# Altium PCB ArtFire.PcbDoc
Units mil, origin at the board's own origin, x right, y up, seen from the top; angles counter-clockwise.
Board outline 3779.53 x 3504.02 mil, 2 copper layers (Top Layer, Bottom Layer); 112 components, 86 nets, 393 pads, 153 vias.
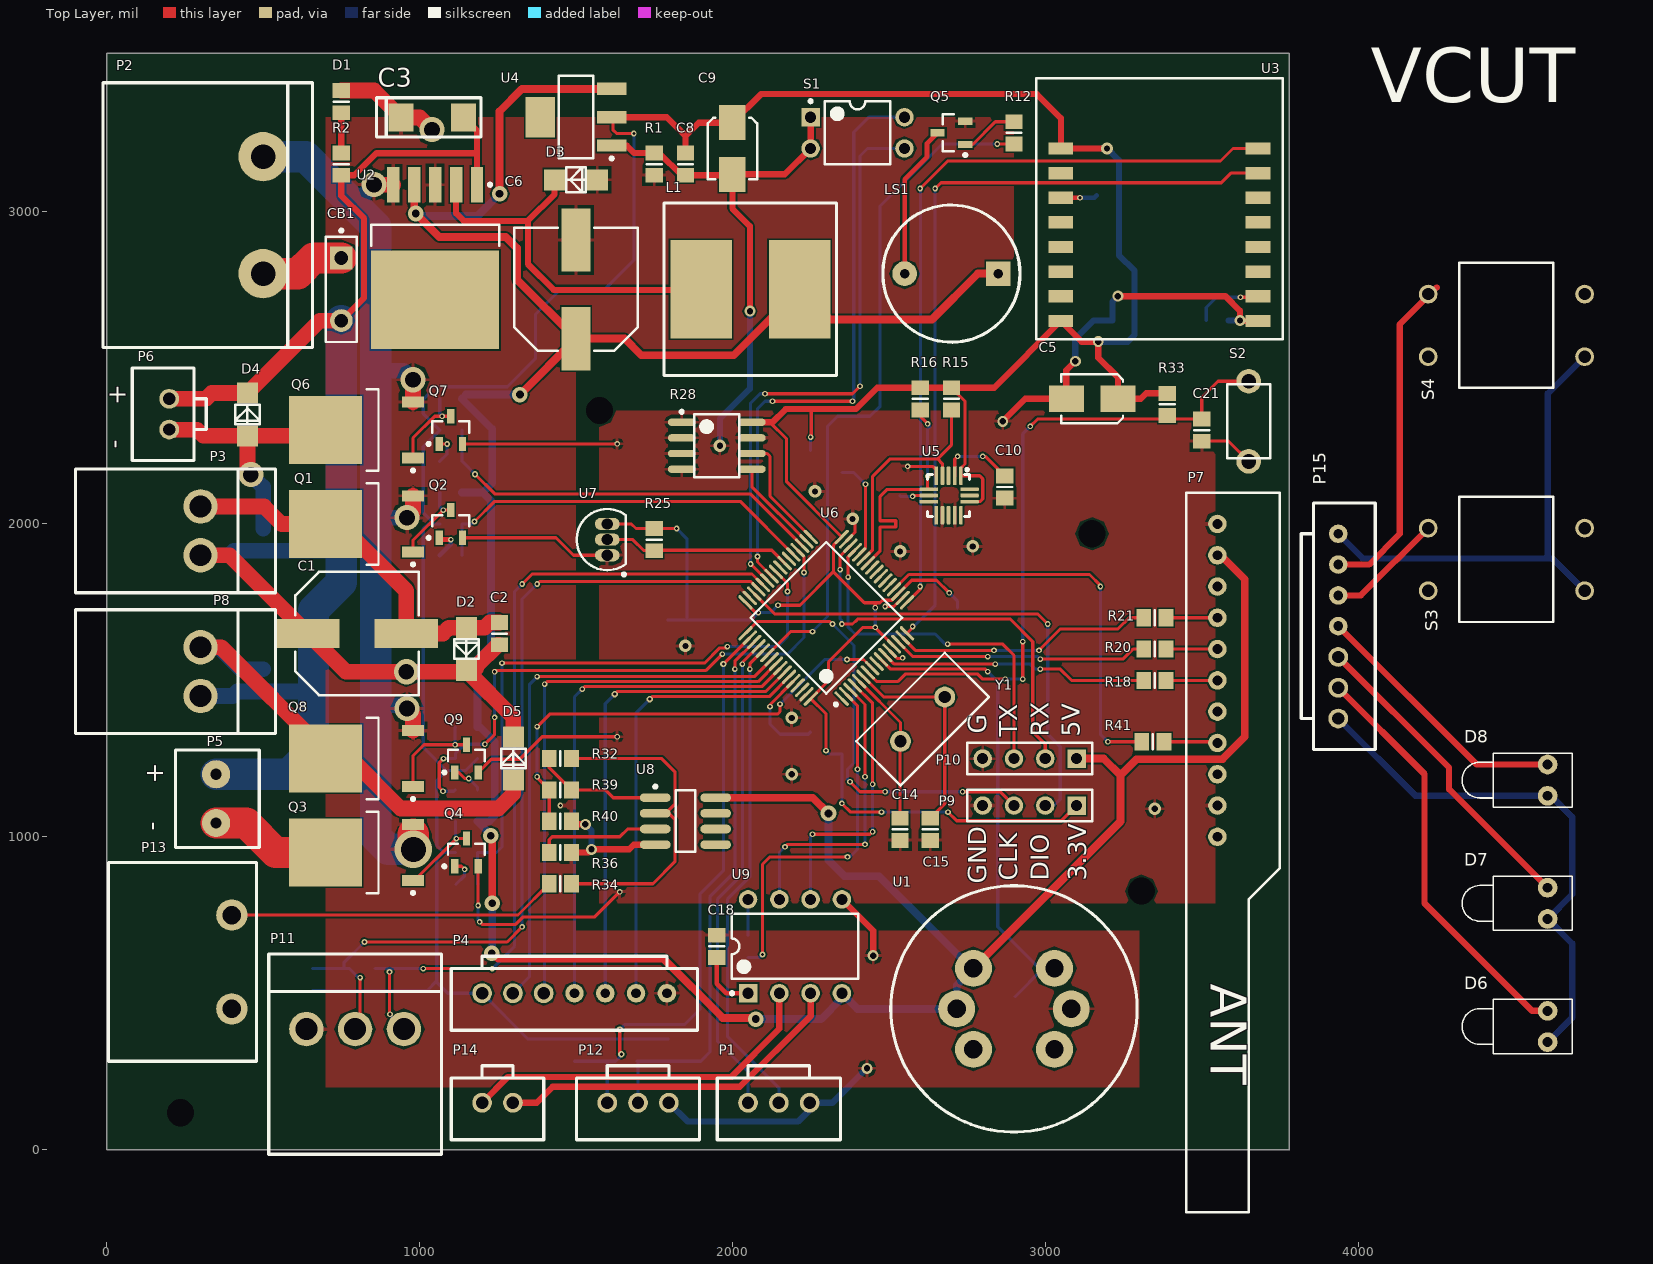
[diagram p0: Top Layer view]
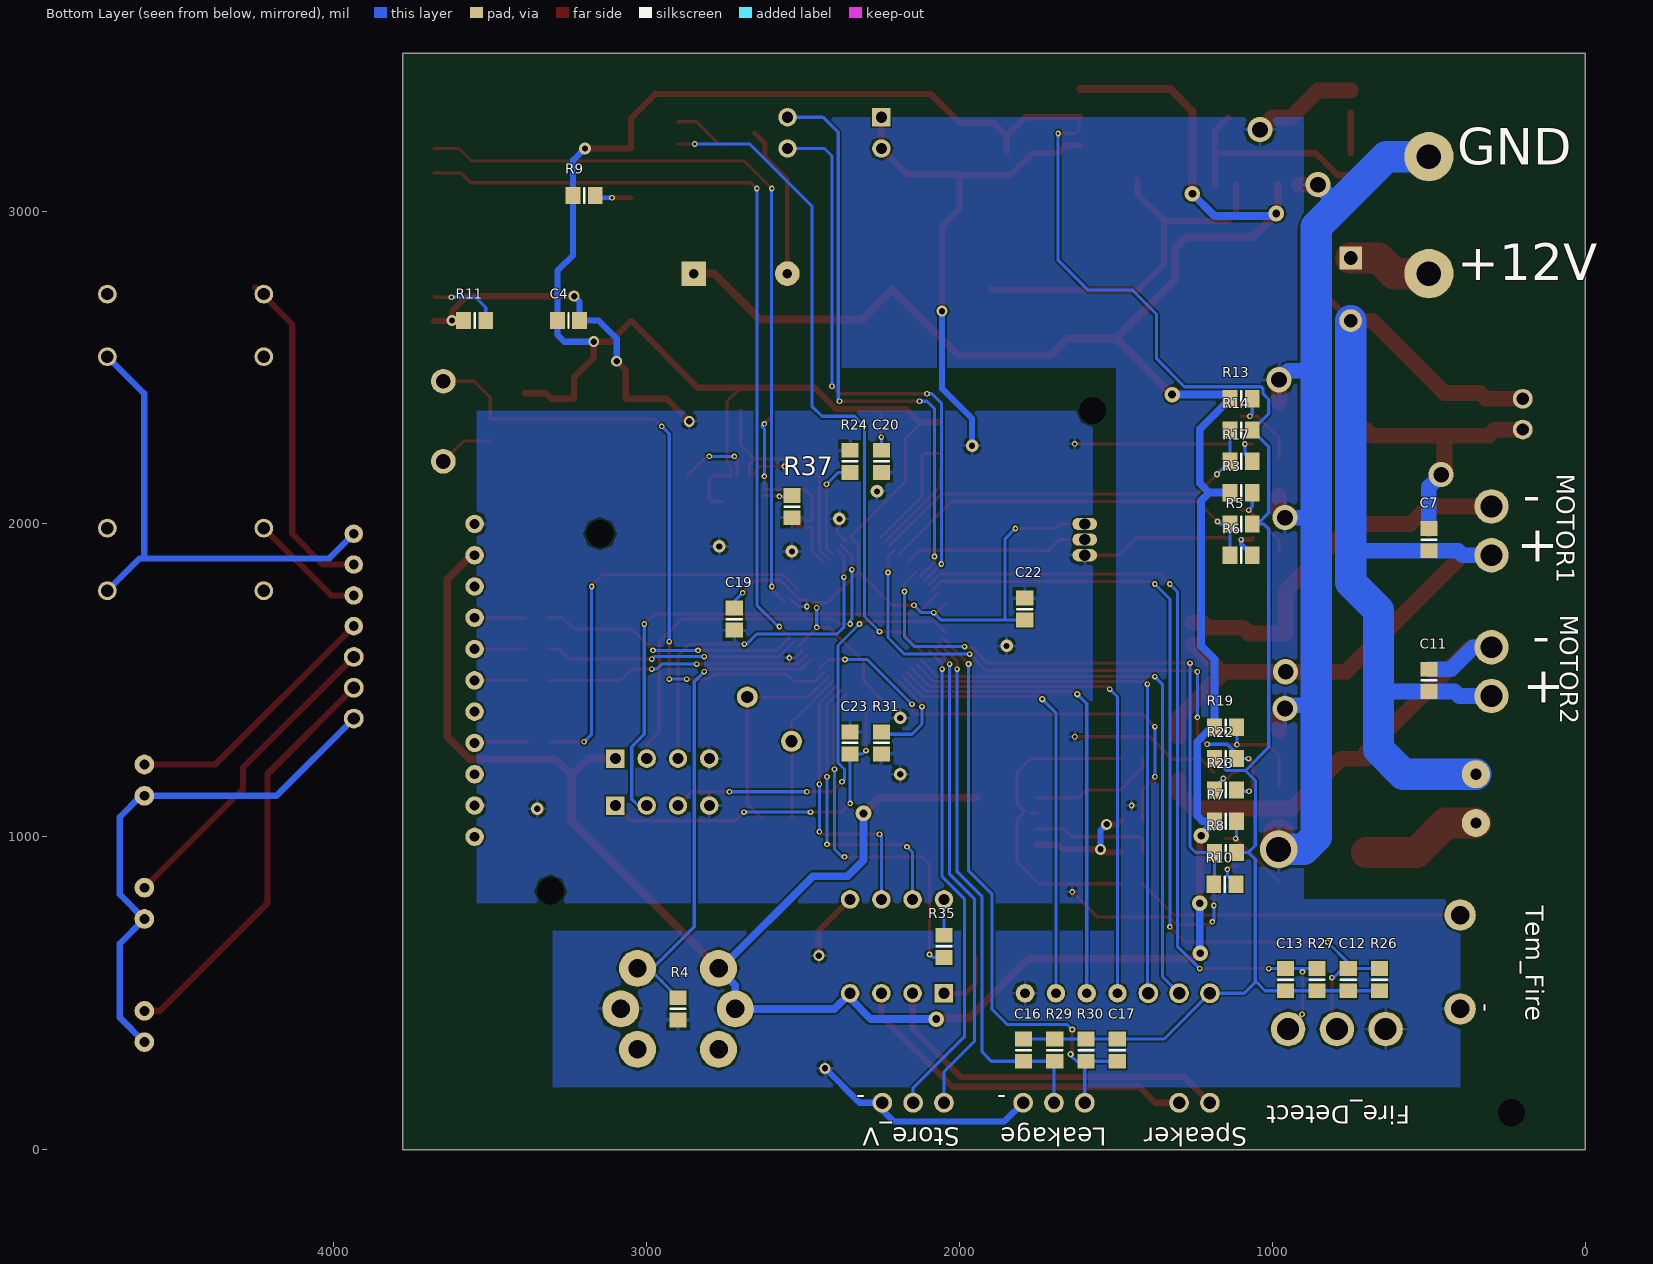
[diagram p1: Bottom Layer view, seen from below]

## Layer stack, top to bottom
Top Solder: solder mask 0.4, Solder Resist, Dk 3.5
Top Layer: signal copper 1.4
Dielectric 1: dielectric 12.6, FR-4, Dk 4.8
Bottom Layer: signal copper 1.4
Bottom Solder: solder mask 0.4, Solder Resist, Dk 3.5

## Board outline
0,0 0,3503.94 3779.45,3503.94 3779.53,3504.02 3779.53,0

## Design rules (kind name [scope] priority, off if disabled: settings)
Clearance [All] p1: gap=6
MinimumSolderMaskSliver [All] p1: minsoldermaskwidth=1
PolygonConnect [All] p1: connectstyle=Relief reliefconductorwidth=10 reliefentries=4 polygonreliefangle="90 Angle" airgapwidth=10
RoutingVias [All] p1: holewidth=10 width=18 viastyle="Through Hole" minholewidth=10 minwidth=18 maxholewidth=393.7 maxwidth=393.7
SilkToBoardRegionClearance [All] p1 off:
SilkToSilkClearance [All] p1 off: silktosilkclearance=10
SilkToSolderMaskClearance [IsPad] p1: minsilkscreentomaskgap=0 clearancetoexposedcopper=TRUE
SolderMaskExpansion [All] p1: expansion=4
UnpouredPolygon [All] p1: allowunpoured=FALSE
Width [All] p1: maxlimit=393.7 minlimit=9.84 preferedwidth=9.84
25 further rules are at their usual default settings.

## Classes and differential pairs
component class ArtFire: C1 C2 C3 C4 C5 C6 C7 C8 C9 C10 C11 C12 C13 C14 C15 C16 C17 C18 C19 C20 C21 C22 C23 CB1 D1 D2 D3 D4 D5 L1 LS1 P1 P2 P3 P4 P5 P6 P7 P8 P9 P10 P11 P12 P13 P14 Q1 Q2 Q3 Q4 Q5 Q6 Q7 Q8 Q9 R1 R2 R3 R4 R5 R6 R7 R8 R9 R10 R11 R12 R13 R14 R15 R16 R17 R18 R19 R20 R21 R22 R23 R24 R25 R26 R27 R28 R29 R30 R31 R32 R33 R34 R35 R36 R37 R39 R40 R41 S1 S2 U1 U2 U3 U4 U5 U6 U7 U8 U9 Y1

## Components (designator, comment, footprint, x,y, rotation, side; value= is the part's Value field where it differs from the comment)
C1 "Cap Pol1" CAP_10*10MM 800,1650 r0 top
C2 "Cap Semi" 6-0805_N 1255.91,1649.61 r90 top
C3 "Cap Pol1" 6032 940.94,3299.21 r0 top
C4 "Cap Semi" 6-0805_N 3250,2650 r180 bottom
C5 "Cap Pol1" Cap_5*4mm 3150,2400 r180 top
C6 "Cap Pol1" CAP_10*10MM 1500,2750 r90 top
C7 "Cap Semi" 6-0805_N 500,1950 r90 bottom
C8 "Cap Semi" 6-0805_N 1850,3150 r270 top
C9 "Cap Pol1" Cap_5*4mm 2000,3200 r270 top
C10 "Cap Semi" 6-0805_N 2870.08,2118.11 r90 top
C11 "Cap Semi" 6-0805_N 500,1500 r90 bottom
C12 "Cap Semi" 6-0805_N 758,543.43 r270 bottom
C13 "Cap Semi" 6-0805_N 958,543.43 r270 bottom
C14 "Cap Semi" 6-0805_N 2536,1024 r270 top
C15 "Cap Semi" 6-0805_N 2632,1024 r270 top
C16 "Cap Semi" 6-0805_N 1796,318 r90 bottom
C17 "Cap Semi" 6-0805_N 1496,318 r90 bottom
C18 "Cap Semi" 6-0805_N 1950,650 r270 top
C19 "Cap Semi" 6-0805_N 2720,1696 r270 bottom
C20 "Cap Semi" 6-0805_N 2250,2200 r270 bottom
C21 "Cap Semi" 6-0805_N 3500,2300 r90 top
C22 "Cap Semi" 6-0805_N 1792,1728 r90 bottom
C23 "Cap Semi" 6-0805_N 2350,1300 r90 bottom
CB1 "RF16700" SPST-2 750,2750 r270 top
D1 "PWR" 6-0805_N 750,3350 r90 top
D2 "Diode" US1M 1150,1600 r270 top
D3 "1N5822" US1M 1500,3100 r180 top
D4 "Diode" US1M 450,2350 r90 top
D5 "Diode" US1M 1300,1250 r90 top
D6 "RED" LED-1 4605.67,393.7 r180 top
D7 "YELLOW" LED-1 4605.67,787.4 r180 top
D8 "GREEN" LED-1 4605.67,1181.1 r180 top
L1 "Inductor" CDRH127 1900,2750 r0 top
LS1 "Buzzer" BUZZER 2700,2800 r0 top
P1 "Alcohol_Detect" XH2.54-3P 2050,150 r0 top
P2 "HB-9500" HB-9500 500,2800 r90 top
P3 "Pump2" CH3.96_2P 300,1900 r90 top
P4 "XH2.54-7P" XH2.54-7P 1200,500 r0 top
P5 "Fire_UP" KF3.96_2P 350,1200 r0 top
P6 "Fan" XH2.54-2P 200,2400 r270 top
P7 "Superheterodyne_Receiver" Sperheterodyne_Receiver 3550,1000 r180 top
P8 "Pump_1" CH3.96_2P 300,1450 r90 top
P9 "Debug_Port" HDR1X4 3100,1100 r180 top
P10 "UART_Debug_Port" HDR1X4 3100,1250 r180 top
P11 "Fire_Detect" CH3.96_3P 950,385.43 r180 top
P12 "Leakage_Detect" XH2.54-3P 1600,150 r0 top
P13 "thermoelectric_couple" KF7.62-2P 400,750 r270 top
P14 "Speaker" XH2.54-2P 1200,150 r0 top
P15 "XH2.54-7P" XH2.54-7P 3936.38,1377.95 r90 top
Q1 "ADO484" DPAK_AOD484 800,2000 r180 top
Q2 "NPN" SOT-23_N 1100,2000 r90 top
Q3 "ADO484" DPAK_AOD484 800,950 r180 top
Q4 "NPN" SOT-23_N 1150,950 r90 top
Q5 "NPN" SOT-23_N 2700,3250 r180 top
Q6 "ADO484" DPAK_AOD484 800,2300 r180 top
Q7 "NPN" SOT-23_N 1100,2300 r90 top
Q8 "ADO484" DPAK_AOD484 800,1250 r180 top
Q9 "NPN" SOT-23_N 1150,1250 r90 top
R1 "Res3" 6-0805_N 1750,3150 r90 top
R2 "Res" 6-0805_N 750,3150 r270 top
R3 "Res3" 6-0805_N 1100,2100 r180 bottom
R4 "Res3" 6-0805_N 2900,450 r270 bottom
R5 "Res3" 6-0805_N 1100,2000 r180 bottom
R6 "Res3" 6-0805_N 1100,1900 r180 bottom
R7 "Res3" 6-0805_N 1150,1050 r180 bottom
R8 "Res3" 6-0805_N 1150,950 r180 bottom
R9 "Res3" 6-0805_N 3200,3050 r0 bottom
R10 "Res3" 6-0805_N 1152,848 r180 bottom
R11 "Res3" 6-0805_N 3550,2650 r0 bottom
R12 "Res3" 6-0805_N 2900,3250 r270 top
R13 "Res3" 6-0805_N 1100,2400 r180 bottom
R14 "Res3" 6-0805_N 1100,2300 r180 bottom
R15 "Res3" 6-0805_N 2700,2400 r90 top
R16 "Res3" 6-0805_N 2600,2400 r90 top
R17 "Res3" 6-0805_N 1100,2200 r180 bottom
R18 "Res3" 6-0805_N 3350,1500 r180 top
R19 "Res3" 6-0805_N 1150,1350 r180 bottom
R20 "Res3" 6-0805_N 3350,1600 r180 top
R21 "Res3" 6-0805_N 3350,1700 r180 top
R22 "Res3" 6-0805_N 1150,1250 r0 bottom
R23 "Res3" 6-0805_N 1150,1150 r0 bottom
R24 "Res3" 6-0805_N 2350,2200 r270 bottom
R25 "Res3" 6-0805_N 1750,1950 r90 top
R26 "Res3" 6-0805_N 658,543.43 r270 bottom
R27 "Res3" 6-0805_N 858,543.43 r270 bottom
R28 "AT24C02" SOP8_TDA2822 1950,2250 r0 top
R29 "Res3" 6-0805_N 1696,318 r90 bottom
R30 "Res3" 6-0805_N 1596,318 r90 bottom
R31 "Res3" 6-0805_N 2250,1300 r90 bottom
R32 "Res3" 6-0805_N 1450,1250 r180 top
R33 "Res3" 6-0805_N 3389.76,2381.89 r270 top
R34 "Res3" 6-0805_N 1450,850 r0 top
R35 "Res3" 6-0805_N 2050,650 r270 bottom
R36 "Res3" 6-0805_N 1450,950 r180 top
R37 "Res3" 6-0805_N 2535.43,2055.12 r90 bottom
R39 "Res3" 6-0805_N 1450,1150 r0 top
R40 "Res3" 6-0805_N 1450,1050 r180 top
R41 "Res3" 6-0805_N 3344,1304 r180 top
S1 "SW DIP-2" DIP-4 2400,3250 r0 top
S2 "Reset" SWP_PB_6.5mm 3650,2200 r90 top
S3 "SW-PB" KEY_B 4723.78,2086.61 r180 top
S4 "SW-PB" KEY_B 4723.78,2834.65 r180 top
U1 "MQ_Alcohol" MQ 2900,450 r0 top
U2 "LM2576SX-5.0" TS5B_L 1050,2850 r270 top
U3 "ESP-07" ESP-07_Wifi 3050,3200 r0 top
U4 "AMS1117" SOT223_N 1500,3300 r180 top
U5 "MMA8452Q" QFN-16 2750,2150 r270 top
U6 "STM32F103RBT7" LQFP64_L 2300,1700 r135 top
U7 "DS18B20" TO-92A 1600,1950 r0 top
U8 "LM358AMX" M08A_M 1850,1050 r0 top
U9 "YF017" DIP-8 2200,650 r90 top
Y1 "XTAL" XTAL 2608,1376 r225 top

## Footprints (in the part's own frame and the unit in brackets; to place one, negate y for a bottom-side part, rotate by r counter-clockwise, add the part's x,y. Pads: shape width x height; smd on the part's side, far side on the other; paste and mask are expansions set on the pad)
6-0805_N [mm] "Chip Resistor, Body 2.0x1.2mm, IPC Medium Density"
  rect 1.2x1.4 smd: 1(-0.9,0) 2(0.9,0)
  silkscreen extent 0,-0.6 0,0.6, body extent -1.07,-0.7 1.07,0.7, height 0.7
6032 [mm] "Tantalum_SMT_Cap"
  rect 2.03x2.28 smd: 1(5.08,0) 2(0,0)
  silkscreen extent -2,-1.6 6.5,1.6
BUZZER [mm]
  rect 2x2 hole 0.762: 1(3.8,0)
  round 2 hole 0.762: 2(-3.8,0)
  silkscreen extent -5.56,-5.57 5.57,5.57
Cap_5*4mm [mm]
  rect 2.85x2.15 smd: 1(-2.1,0) 2(2.1,0)
  silkscreen extent -2.5,-2 2.5,2, body extent -2.5,-2 2.5,2, height 6
CAP_10*10MM [mm]
  rect 5.15x2.35 smd: 1(-4,0) 2(4,0)
  silkscreen extent -5,-5 5,5, body extent -5,-5 5,5, height 10
CDRH127 [mm]
  rect 5x8 smd: 1(0,0) 2(8,0)
  silkscreen extent -3,-7 11,7
CH3.96_2P [mil]
  round 110 hole 70: 1(0,0) 2(155.91,0)
  silkscreen extent -120,-240 276,400
CH3.96_3P [mil]
  round 110 hole 70: 1(0,0) 2(155.91,0) 3(311.81,0)
  silkscreen extent -120,-240 432,400
DIP-4 [mm] "DIP; 4 Leads; Row Spacing 7.62 mm; Pitch 2.54 mm"
  rect 1.5x1.5 hole 0.9: 1(-3.81,1.27)
  round 1.5 hole 0.9: 2(-3.81,-1.27) 3(3.81,-1.27) 4(3.81,1.27)
  silkscreen extent -3.93,-2.55 2.65,2.69, body extent -3.15,-2.5 3.15,2.5, height 5.6
DIP-8 [mm] "DIP; 8 Leads; Row Spacing 7.62 mm; Pitch 2.54 mm"
  rect 1.5x1.5 hole 0.9: 1(-3.81,3.81)
  round 1.5 hole 0.9: 2(-3.81,1.27) 3(-3.81,-1.27) 4(-3.81,-3.81) 5(3.81,-3.81) 6(3.81,-1.27) 7(3.81,1.27) 8(3.81,3.81)
  silkscreen extent -3.93,-5.15 2.65,5.23, body extent -3.6,-5.15 3.6,5.15, height 5.08
DPAK_AOD484 [mm] "D-PAK, 3-Pads, Body 5.95x6.66mm (max), IPC Medium Density"
  rect 1.8x0.9 smd: 1(-4.55,2.28) 3(-4.55,-2.28)
  rect 5.9x5.5 smd: 2(2.55,0)
  silkscreen extent -4.68,-3.3 -0.8,3.4, body extent -1.75,-3.3 3.95,3.3, height 2.38
ESP-07_Wifi [mm]
  rect 2x1 smd: 1(0,0) 2(0,-2) 3(0,-4) 4(0,-6) 5(0,-8) 6(0,-10) 7(0,-12) 8(0,-14) 9(16,-14) 10(16,-12) 11(16,-10) 12(16,-8) 13(16,-6) 14(16,-4) 15(16,-2) 16(16,0)
  silkscreen extent -2,-15.5 18,5.7
HB-9500 [mm]
  round 4 hole 2: 1(0,0) 2(9.5,0)
  silkscreen extent -6,-4 15.5,13
HDR1X4 [mm] "Connector; Header; 4 Position"
  rect 1.5x1.5 hole 0.9: 1(0,0)
  round 1.5 hole 0.9: 2(2.54,0) 3(5.08,0) 4(7.62,0)
  silkscreen extent -1.27,-1.27 8.89,1.27
KEY_B [mil]
  round 60 hole 39.37: 1(0,300) 2(500,100) 3(500,300) 4(0,100)
  silkscreen extent 100,0 400,400
KF3.96_2P [mil]
  round 90 hole 35.43: 1(0,0) 2(0,-155.91)
  silkscreen extent -130,-234 138,78
KF7.62-2P [mm] "KF7.62-2P"
  round 2.54 hole 1.5: 1(0,0) 2(7.62,0)
  silkscreen extent -4.25,-10 11.87,2
LED-1 [mm] "LED; 2 Leads"
  round 1.6 hole 0.8: 1(0,1.27) 2(0,-1.27)
  silkscreen extent -2,-2.2 6.95,2.2
LQFP64_L [mm] "Thin QFP, 64-Leads, Body 10x10mm, Pitch 0.5mm, IPC High Density"
  oval 1.55x0.25 smd: 1(-5.525,3.75) 2(-5.525,3.25) 3(-5.525,2.75) 4(-5.525,2.25) 5(-5.525,1.75) 6(-5.525,1.25) 7(-5.525,0.75) 8(-5.525,0.25) 9(-5.525,-0.25) 10(-5.525,-0.75) 11(-5.525,-1.25) 12(-5.525,-1.75) 13(-5.525,-2.25) 14(-5.525,-2.75) 15(-5.525,-3.25) 16(-5.525,-3.75) 33(5.525,-3.75) 34(5.525,-3.25) 35(5.525,-2.75) 36(5.525,-2.25) 37(5.525,-1.75) 38(5.525,-1.25) 39(5.525,-0.75) 40(5.525,-0.25) 41(5.525,0.25) 42(5.525,0.75) 43(5.525,1.25) 44(5.525,1.75) 45(5.525,2.25) 46(5.525,2.75) 47(5.525,3.25) 48(5.525,3.75)
  oval 0.25x1.55 smd: 17(-3.75,-5.525) 18(-3.25,-5.525) 19(-2.75,-5.525) 20(-2.25,-5.525) 21(-1.75,-5.525) 22(-1.25,-5.525) 23(-0.75,-5.525) 24(-0.25,-5.525) 25(0.25,-5.525) 26(0.75,-5.525) 27(1.25,-5.525) 28(1.75,-5.525) 29(2.25,-5.525) 30(2.75,-5.525) 31(3.25,-5.525) 32(3.75,-5.525) 49(3.75,5.525) 50(3.25,5.525) 51(2.75,5.525) 52(2.25,5.525) 53(1.75,5.525) 54(1.25,5.525) 55(0.75,5.525) 56(0.25,5.525) 57(-0.25,5.525) 58(-0.75,5.525) 59(-1.25,5.525) 60(-1.75,5.525) 61(-2.25,5.525) 62(-2.75,5.525) 63(-3.25,5.525) 64(-3.75,5.525)
  silkscreen extent -5.65,-4.35 4.35,4.55, body extent -5,-5 5,5, height 1.6
M08A_M [mm] "SOIC, 8-Leads, Body 4.9x3.9mm, Pitch 1.27mm, IPC Low Density"
  oval 2.5x0.7 smd: 1(-2.45,1.905) 2(-2.45,0.635) 3(-2.45,-0.635) 4(-2.45,-1.905) 5(2.45,-1.905) 6(2.45,-0.635) 7(2.45,0.635) 8(2.45,1.905)
  silkscreen extent -2.57,-2.5 0.8,2.93, body extent -2,-2.5 2,2.5, height 1.75
MQ [mm]
  round 3 hole 1.5: 1(-3.288,3.288) 2(-4.65,0) 3(-3.288,-3.288) 4(3.288,-3.288) 5(4.65,0) 6(3.288,3.288)
  silkscreen extent -10,-10 10,10
QFN-16 [mm] "MMA8452Q"
  rrect50% 1.5x0.3 smd: 1(-0.1,-0.5) 2(-0.1,-1) 3(-0.1,-1.5) 4(-0.1,-2) 5(-0.1,-2.5) 9(3.1,-2.5) 10(3.1,-2) 11(3.1,-1.5) 12(3.1,-1) 13(3.1,-0.5)
  rrect50% 0.3x1.5 smd: 6(1,-3.1) 7(1.5,-3.1) 8(2,-3.1) 14(2,0.2) 15(1.5,0.2) 16(1,0.2)
  silkscreen extent -0.7,-3.2 3.2,0.2
SOP8_TDA2822 [mm] "TSOP, 8-Leads, Body 5.00x3.95mm, Pitch 1.27mm, IPC Medium Density"
  oval 2.25x0.6 smd: 1(-2.85,1.905) 2(-2.85,0.635) 3(-2.85,-0.635) 4(-2.85,-1.905) 5(2.85,-1.905) 6(2.85,-0.635) 7(2.85,0.635) 8(2.85,1.905)
  silkscreen extent -2.97,-2.55 1.83,2.88, body extent -2,-2.55 2,2.55, height 1.55
SOT223_N [mm] "SOT223, 4-Leads, Body 6.5x3.5mm, Pitch 2.3mm, Lead Span 7mm, IPC Medium Density"
  rect 2.4x1 smd: 1(-2.9,2.3) 2(-2.9,0) 3(-2.9,-2.3)
  rect 2.4x3.3 smd: 4(2.9,0)
  silkscreen extent -3.03,-3.35 1.4,3.47, body extent -1.85,-3.35 1.85,3.35, height 1.7
SOT-23_N [mm] "SOT23, 3-Leads, Body 2.9x1.3mm, Pitch 0.95mm, Lead Span 2.5mm, IPC Medium Density"
  rect 1.15x0.6 smd: 1(-1.125,0.95) 2(-1.125,-0.95) 3(1.125,0)
  silkscreen extent -1.25,-1.5 0.7,1.92, body extent -0.7,-1.5 0.7,1.5, height 1.1
Sperheterodyne_Receiver [mm]
  round 1.5 hole 0.8: 1(0,0) 2(0,-2.54) 3(0,-5.08) 4(0,-7.62) 5(0,-10.16) 6(0,-12.7) 7(0,-15.24) 8(0,-17.78) 9(0,-20.32) 10(0,-22.86) 11(0,-25.4)
  silkscreen extent -5.08,-27.94 2.54,30.48
SPST-2 [mm] "Switch; 2 Leads"
  rect 1.85x1.85 hole 1.1: 1(-2.54,0)
  round 1.85 hole 1.1: 2(2.54,0)
  silkscreen extent -4.89,-1.27 4.28,1.27
SWP_PB_6.5mm [mm]
  round 2 hole 1.2: 1(0,0) 2(6.5,0)
  silkscreen extent 0.25,-1.75 6.25,1.75
TO-92A [mm] "TO, Flat Index; 3 In-Line, Axial Leads; Body Dia. 4.5mm; Leads 0.51 x 0.48 mm (max)"
  oval 2x1 hole 0.9: 1(0,-1.27) 2(0,0) 3(0,1.27)
  silkscreen extent -2.48,-2.95 1.5,2.48, body extent -2.5,-2.5 1.5,2.5, height 6.86
TS5B_L [mm] "D2-PAK, 6-Leads, Body 8.6x10.2mm, Pitch 1.7mm, Lead Span 14.1mm, IPC High Density"
  rect 2.9x1 smd: 1(-5.95,3.4) 2(-5.95,1.7) 3(-5.95,0) 4(-5.95,-1.7) 5(-5.95,-3.4)
  rect 8x10.4 smd: 6(3.4,0)
  silkscreen extent -6.07,-5.2 -1,5.2, body extent -2.7,-5.2 6.19,5.2, height 4.65
US1M [mm]
  rect 1.7x1.7 smd: 1(-1.74,0) 2(1.74,0)
  silkscreen extent -0.8,-1 0.8,1
XH2.54-2P [mm]
  round 1.6 hole 1: 1(0,0) 2(2.5,0)
  silkscreen extent -2.5,-3 5,3
XH2.54-3P [mm]
  round 1.6 hole 1: 1(0,0) 2(2.5,0) 3(5,0)
  silkscreen extent -2.5,-3 7.5,3
XH2.54-7P [mm]
  round 1.6 hole 1: 1(0,0) 2(2.5,0) 3(5,0)
  round 1.5 hole 0.8: 4(7.5,0) 5(10,0) 6(12.5,0) 7(15,0)
  silkscreen extent -2.5,-3 17.5,3
XTAL [mm]
  round 1.7 hole 1: 1(-2.54,0) 2(2.54,0)
  silkscreen extent -5.08,-2.54 5.08,2.54

## Part data
C1 C3 C5 C6 C9: "Polarized Capacitor (Radial)"
C2 C4 C7 C8 C10 C11 C12 C13 C14 C15 C16 C17 C18 C19 C20 C21 C22 C23: "Capacitor (Semiconductor SIM Model)"
CB1: library part "Circuit Breaker", "Circuit Breaker"
D1: library part LED0, "Typical INFRARED GaAs LED"
D2 D3 D4 D5: library part "Diode BAT17", "Silicon RF Schottky Diode for Mixer Applications in the VHF/UHF Range"
D6 D7 D8: library part LED1, "Typical RED GaAs LED"
LS1: "Magnetic Transducer Buzzer"
P1 P12: library part XH2.54-3P
P2: "High current connector"
P3 P8: library part CH3.96_2P
P5 P13: library part KF3.96
P6 P14: library part XH2.54-2P
P9 P10: library part "Header 4", "Header, 4-Pin"
P11: library part CH3.96_3P
Q1 Q3 Q6 Q8: library part NMOS-2, "N-Channel Power MOSFET"
Q2 Q4 Q5 Q7 Q9: "NPN Bipolar Transistor"
R1 R3 R4 R5 R6 R7 R8 R9 R10 R11 R12 R13 R14 R15 R16 R17 R18 R19 R20 R21 R22 R23 R24 R25 R26 R27 R29 R30 R31 R32 R33 R34 R35 R36 R37 R39 R40 R41: "Resistor"
R2: library part Res1, "Resistor"
S1: "DIP Switch, 2 Position, SPST"
S2: library part SW-PB, "Switch"
S3 S4: "Switch"
U1: library part MQ
U2: library part CMP-0069-00116-2, "SIMPLE SWITCHER? 3A Step-Down Voltage Regulator, 5-pin TO-263"
U3: library part ESP-07_Wifi
U6: library part CMP-0237-00161-1, "STM32 ARM-based 32-bit MCU Performance Line with 128 kB Flash, 20 kB Internal RAM, -40 to +105°C Temperature, 64-Pin LQFP, Tray"
U8: library part CMP-0055-00768-2, "Low Power Dual Operational Amplifier, 8-pin Narrow SOIC"
Y1: "Crystal Oscillator"

## Free pads (board coordinates)
  round 1 hole 86.61: 0(1574.8,2362.2) 1(3149.61,1968.5) 3(3307.09,826.77)
  round 100 hole 125.98: 0(3975.75,2952.76) 1(3975.75,196.85) 2(4448.19,1496.06) 3(4763.15,196.85) 4(4763.15,2952.76)
  round 0 hole 86.61: 2(236.22,118.11)

## Via types
v1: diameter 18, hole 10, Top Layer to Bottom Layer, 111 vias
v2: diameter 35, hole 20, Top Layer to Bottom Layer, 10 vias
v3: diameter 40, hole 20, Top Layer to Bottom Layer, 9 vias
v4: diameter 50, hole 25, Top Layer to Bottom Layer, 8 vias
v5: diameter 80, hole 50, Top Layer to Bottom Layer, 7 vias
v6: diameter 20, hole 10, Top Layer to Bottom Layer, 6 vias
v7: diameter 38, hole 20, Top Layer to Bottom Layer, 1 vias
v8: diameter 120, hole 80, Top Layer to Bottom Layer, 1 vias

## Nets (pads, with @x,y where several pads share a name; then routed paths per layer and width w, separated by ;. In a path a pad name is that pad's centre, name@x,y a point inside that pad or via, vN(x,y) a via of type N, cw(c..) or ccw(c..) an arc to the next point about the centre after c; other vN are vias at no path point)
+3.3V: C4.1 C5.1 C8.1 C9.1 C12.2 C13.2 C16.2 C17.2 C19.1 C20.1 C22.1 C23.1 P4.1 P9.1 R5.2 R8.2 R9.2 R14.2 R15.2 R16.2 R22.2 R25.2 R26.2 R27.2 R28.8 R29.2 R30.2 R33.1 U3.1 U3.8 U4.2 U5.1 U5.14 U6.13 U6.19 U6.32 U6.48 U6.64 U7.3 | length 13753.5
  Top Layer w10: U7.3 1677.17,2000 1691.73,1985.43 R25.2 v1(1821.65,1985.43) ; U4.2 1618.11,3296.06 1618.11,3259.84 1629.92,3248.03 v1(1685.04,3248.03) ; U6.48 2074.67,1716.54 v1(2082.68,1716.54) ; 2119.88,2325 2173.23,2271.65 2173.23,2134.39 U6.32 2322.83,1931.63 2322.83,1847.17 ; v1(2145.67,1740.16) 2215.83,1740.16 2322.83,1847.17 ; v1(2250,2277.56) 2251.97,2279.53 2251.97,2367 ; v1(2299.21,1275.59) 2299.21,1393.17 U6.64 2307.09,1498.3 2307.09,1559.06 2417.32,1669.29 v1(2456.69,1669.29) 2456.69,1668.58 U6.13 ; 2322.83,1881.89 2322.83,1847.17 ; v1(2350,1106.69) 2377.95,1078.74 v1(2476.38,1078.74) ; v1(2456.69,1732.28) 2456.69,1748.03 ; v1(2688.98,1078.74) 2716.54,1051.18 3051.18,1051.18 P9.1 ; v1(2692.91,1779.53) 2652.44,1820 2573.11,1820 U6.19 2509.11,1756 2479.72,1756 2471.75,1748.03 2456.69,1748.03 ; R15.2 2743.43,2392 2743.43,2191.43 2730.32,2178.32 U5.1 2790.06,2153.94 2800,2144 2800,2080 2791.26,2071.26 U5.14 ; 2322.83,1847.17 2421.97,1748.03 2456.69,1748.03
  Top Layer w20: U4.2 1790.55,3300 1850,3240.55 ; C8.1 1850,3240.55 ; R28.8 2119.88,2325 2128.15,2325 2170.15,2367 2251.97,2367 2394.36,2367 2462.79,2435.43 R16.2 R15.2 2836.61,2435.43 U3.8 3116.14,2582.68 v2(3169.29,2582.68) 3169.29,2531.5 3232.68,2468.11 C5.1 3305.51,2400 3322.83,2417.32 R33.1 ; v7(3197.64,3200) U3.1 3050,3296.46 2972.44,3374.02 2091.34,3374.02 C9.1 1892.13,3282.68 1850,3240.55
  Bottom Layer w10: R26.2 C12.2 R27.2 C13.2 1023.75,508 1055.12,539.37 ; R5.2 R5.2@1047.24,2000 ; R8.2 1077.56,950 ; R22.2 1146.87,1211.44 1086.39,1211.44 ; v1(1685.04,3248.03) 1685.04,2842.52 1590.55,2748.03 1448.82,2748.03 1370.08,2669.29 1370.08,2527.56 1281.08,2438.56 1036.39,2438.56 1029.94,2432.12 1029.94,2415.77 1011.81,2397.64 1011.81,2352.76 R14.2 1011.81,2247.24 1011.81,2035.43 R5.2@1047.24,2000 ; C22.1 1854.33,1692.57 ; C16.2 R29.2 R30.2 C17.2 1346.57,353.43 P4.1 1090,500 1055.12,534.88 1055.12,539.37 ; v1(1821.65,1985.43) 1854.33,1952.76 1854.33,1692.57 ; v1(2145.67,1740.16) 2122.05,1716.54 v1(2082.68,1716.54) 2058.71,1692.57 1854.33,1692.57 ; C20.1 v1(2250,2277.56) ; v1(2299.21,1275.59) 2310.24,1264.57 C23.1 v1(2350,1106.69) ; v1(2456.69,1669.29) v1(2456.69,1732.28) ; v1(2476.38,1078.74) v1(2688.98,1078.74) ; v1(2692.91,1779.53) 2720,1752.44 C19.1 ; R5.2@1047.24,2000 1027.56,2000 1011.81,1984.25 1011.81,1286.02 1086.39,1211.44 ; 1055.12,539.37 1055.12,927.56 1077.56,950 ; 1077.56,950 1055.12,972.44 1055.12,1111.13 1054.8,1111.44 1054.8,1179.86 1086.39,1211.44
  Bottom Layer w20: v2(3169.29,2582.68) 3263.78,2582.68 3285.43,2604.33 C4.1 3285.43,2809.06 3235.43,2859.06 R9.2 3235.43,3162.2 v7(3197.64,3200)
+5V: C6.1 L1.2 LS1.1 P7.10 P10.1 R3.1 R7.1 R13.1 R19.1 U1.1 U1.2 U2.4 U4.3 U8.8 U9.4 | length 10773.2
  Top Layer w25: U2.4 983.07,2997.24 v4(988.19,2992.13) 1062.99,2917.32 1275.59,2917.32 1311.02,2881.89 1311.02,2781.5 C6.1 ; v4(1227.78,1003.15) 1232.28,998.65 v4(1232.28,787.4) ; v4(1230.63,628) 1232.63,630 1252.63,610 1780,610 1968.74,421.26 2070.87,421.26 v4(2074.8,417.32) ; v4(1255.91,3055.12) 1255.91,3318.9 1327.56,3390.55 U4.3 ; v4(1320.87,2413.39) C6.1 ; U8.8 2256.89,1125 v4(2307.09,1074.8) ; U1.1 3240.16,1049.06 3240.16,1196.85 ; LS1.1 2784.25,2800 2637.8,2653.54 2311.42,2653.54 L1.2 2004.33,2539.37 1708.66,2539.37 1655.51,2592.52 C6.1 ; P10.1 3187.01,1250 3240.16,1196.85 ; P7.10 3560.63,1900 3637.8,1822.83 3637.8,1319.87 3565.95,1248.03 3291.34,1248.03 3240.16,1196.85
  Bottom Layer w25: v4(988.19,2992.13) 996.06,2984.25 1185.04,2984.25 v4(1255.91,3055.12) ; R3.1 1202.36,2100 ; v4(1227.78,1003.15) 1227.78,1007.65 R7.1 1223.23,1050 1240.28,1067.05 1240.28,1303.56 1193.84,1350 R19.1 1185.43,1567.32 1228.35,1610.24 1228.35,2074.02 1202.36,2100 ; v4(1230.63,628) 1232.28,629.65 v4(1232.28,787.4) ; v4(1320.87,2413.39) 1148.82,2413.39 R13.1 1232.28,2303.15 1232.28,2129.92 1202.36,2100 ; v4(2074.8,417.32) 2283.46,417.32 2350,483.86 U9.4 2400,450 U1.2 2716.93,525.83 U1.1 2763.07,579.45 2468.5,874.02 2358.27,874.02 2307.09,925.2 v4(2307.09,1074.8)
+12V: C1.1 C2.1 C3.1 C7.1 C11.1 CB1.2 D2.2 D4.2 D5.2 P3.1 P5.1 P6.1 P8.1 R2.2 U2.1 | length 5871.8
  Top Layer w20: CB1.2 822.83,2722.83 822.83,2976.38 750,3049.21 R2.2 791.73,3114.57 862.2,3185.04 1183.86,3185.04 ; C3.1 1183.86,3256.3 1183.86,3185.04 ; U2.1 1183.86,3185.04
  Top Layer w50: P6.1 317.32,2400 335.83,2418.5 D4.2 681.5,2650 CB1.2 ; P3.1 392.52,1900 C1.1 764.96,1527.56 v5(957.87,1527.56) D2.2@1153.94,1527.56 ; C2.1 1250.52,1614.17 1180.47,1544.13 1180.47,1538.74 1169.29,1527.56 D2.2@1153.94,1527.56 ; D5.2 1300,1381.5 D2.2@1153.94,1527.56
  Bottom Layer w50: P8.1 402.76,1450 417.32,1464.57 C11.1 657.48,1464.57 661.42,1468.5 ; P3.1 392.13,1900 406.69,1914.57 C7.1 744.88,1914.57 750,1909.45
  Bottom Layer w100: P5.1 581.89,1200 661.42,1279.53 661.42,1468.5 661.42,1724.41 750,1812.99 750,1909.45 CB1.2
ADH: P1.1 U6.52 | length 1553.9
  Top Layer w10: v1(2032,1552) 2032,1557.27 U6.52
  Bottom Layer w10: v1(2032,1552) 2032,880 1952,800 1952,347.21 2050,249.21 P1.1
ADL: P1.2 U6.53 | length 1560
  Top Layer w10: v1(2056,1536) 2056,1553.44 U6.53
  Bottom Layer w10: v1(2056,1536) 2056,872 1984,800 1984,362.46 2148.43,198.03 P1.2
ALCOHOL_C: R4.1 U1.6 U6.10 | length 1585.8
  Top Layer w10: U6.10 2505.76,1536 2808,1536 v1(2816,1528)
  Bottom Layer w10: v1(2816,1528) 2848,1496 2848,712 2980.55,579.45 U1.6 2994.02,579.45 R4.1@2904,489.43
BEE: R12.2 U6.54 | length 2196.3
  Top Layer w10: U6.54 2186.4,1656 v1(2256,1656) ; v1(2846.57,3214.57) R12.2
  Bottom Layer w10: v1(2256,1656) 2304,1704 2304,2312 2336,2344 2440,2344 2472,2376 2472,3016 2670.57,3214.57 v1(2846.57,3214.57)
DEBUG_RX: P10.3 U6.29 | length 1154.2
  Top Layer w10: v1(2370,1830) 2370,1891.27 2368,1893.27 U6.29 ; v1(2688,1616) 2864,1616 2900,1580 P10.3
  Bottom Layer w10: v1(2370,1830) 2370,1670 2392,1648 2648,1648 2680,1616 v1(2688,1616)
DEBUG_TX: P10.2 U6.30 | length 1301.5
  Top Layer w10: v1(2344.14,1854.14) 2344.14,1896.97 2344,1897.11 U6.30 ; v1(2350,1680) 2384,1680 2392,1688 ; 2393.7,1688.98 2400.72,1696 2888,1696 2960,1624 2960,1336 3000,1296 P10.2
  Bottom Layer w10: v1(2344.14,1854.14) 2344.14,1696.14 2350,1690.28 v1(2350,1680)
E2_SCL: R28.6 U6.33 | length 373.4
  Top Layer w10: R28.6 2111,2225 2120,2216 2120,2088.79 U6.33
E2_SDA: R28.5 U6.34 | length 303
  Top Layer w10: R28.5 2062.2,2118.75 U6.34
FAN: R14.1 R17.1 U6.35 | length 1299
  Top Layer w10: v6(1177.17,2158.83) 1240,2096 2057.11,2096 U6.35
  Bottom Layer w10: R14.1 R17.1 1136,2200 v6(1177.17,2158.83)
FHD: C13.1 P11.1 R27.1 U6.44 | length 2652.9
  Top Layer w10: v1(904,568.44) 904,434.58 v1(905.51,433.07) ; v1(1011.81,578.74) v1(1232.28,578.74) ; v1(1328,1808) 1360,1840 2062.56,1840 U6.44
  Bottom Layer w10: R27.1 904,578.87 ; v1(904,568.44) 904,578.87 ; v1(905.51,433.07) 905.51,429.92 P11.1 ; v1(1011.81,578.74) 1011.69,578.87 C13.1 904,578.87 ; v1(1232.28,578.74) 1304,650.46 1304,1784 v1(1328,1808)
FIRE_TEM_D: R39.1 R40.2 U6.8 | length 1503.4
  Top Layer w10: v1(1376,1192) 1376,1188.57 R39.1 R40.2 ; v1(1376,1352) 1416,1392 2144,1392 2152,1400 v1(2152,1424) ; v1(2366.14,1566.93) 2419.15,1566.93 U6.8
  Bottom Layer w10: v1(1376,1192) v1(1376,1352) ; v1(2152,1424) 2294.93,1566.93 v1(2366.14,1566.93)
FIRE_UP: R8.1 R10.1 U6.41 | length 1945.3
  Top Layer w10: v1(1263.78,1555.12) 1910.83,1555.12 1959.72,1604 1980,1604 v1(1984,1608) ; U6.41 2176,1810.08 v1(2176,1784)
  Bottom Layer w10: R10.1 1185.43,850 R8.1 1246,950 1263.78,967.78 v1(1263.78,1555.12) ; v1(1984,1608) 2144,1608 2176,1640 v1(2176,1784)
FLD: C12.1 P11.2 R26.1 U6.45 | length 2804
  Top Layer w10: P11.2@803.15,394.49 810,401.34 v1(810,550) ; v1(824,664) 1280,664 v1(1328,712) ; v1(1376,1808) 1384,1816 2058.73,1816 U6.45
  Bottom Layer w10: R26.1 C12.1 ; P11.2 P11.2@800,391.34 ; v1(810,550) 804.81,550 775.95,578.87 C12.1 ; v1(824,664) 758,598 C12.1 ; v1(1328,712) 1328,1760 v1(1376,1808)
IO1: P4.2 U6.55 | length 1816.3
  Top Layer w10: v1(1376,1512) 2070.24,1512 U6.55
  Bottom Layer w10: P4.2 1352,553.57 1352,1488 v1(1376,1512)
IO2: P4.3 U6.56 | length 1755.5
  Top Layer w10: v1(1400,1488) 1408,1496 2082.08,1496 U6.56
  Bottom Layer w10: P4.3 1400,503.15 v1(1400,1488)
IO3: P4.4 U6.57 | length 1643.2
  Top Layer w10: v1(1520,1472) 1528,1480 2093.92,1480 U6.57
  Bottom Layer w10: P4.4 1495.28,1447.28 v1(1520,1472)
IO4: P4.5 U6.58 | length 1540.3
  Top Layer w10: v6(1624,1456) 1632,1464 2105.76,1464 U6.58
  Bottom Layer w10: P4.5 1593.7,1425.7 v6(1624,1456)
IO5: P4.6 U6.59 | length 1432.7
  Top Layer w10: v6(1736,1440) 1744,1448 2117.6,1448 U6.59
  Bottom Layer w10: P4.6 1692.13,1396.13 v6(1736,1440)
LDHD: C17.1 P12.1 R30.1 U6.50 | length 1896.5
  Top Layer w10: v6(1640,384) 1640,310 v6(1645,305) ; v6(1971.05,1552) U6.50
  Bottom Layer w10: C17.1 R30.1 1626.57,282.57 1640,296 ; P12.1 R30.1@1600,278.57 ; v6(1640,384) 1656,400 1848,400 1896,448 1896,816 1971.05,891.05 v6(1971.05,1552)
LDLD: C16.1 P12.2 R29.1 U6.51 | length 1743.7
  Top Layer w10: v1(2008,1536) 2008,1561.11 U6.51
  Bottom Layer w10: R29.1 C16.1 1898.57,282.57 1928,312 1928,808 2008,888 v1(2008,1536) ; P12.2 R29.1@1698.43,280.14
MMA_SCL: R15.1 U5.4 U6.27 | length 741.8
  Top Layer w10: U6.27 2448,1917.6 2448,2152 2504,2208 2656,2208 ; U5.4 2671.26,2192.74 2656,2208 ; R15.1 2700,2252 2656,2208
MMA_SDA: R16.1 U5.6 U6.26 | length 767
  Top Layer w10: U6.26 2472,1913.76 2472,1960 2472,1970 2472,1990 2522,1990 2522,2010 2472,2010 2472,2030 2472,2040 2472,2088 2494.63,2110.63 U5.6 2624,2114.58 v1(2624,2152) ; R16.1 2600,2344 v1(2624,2320)
  Bottom Layer w10: v1(2624,2152) 2624,2304 2632,2312 v1(2624,2320)
NetC1_2: C1.2 C2.2 D2.1 P3.2 Q1.2 | length 1218.6
  Top Layer w50: P3.2 503.15,2055.91 559.06,2000 Q1.2 744.09,2000 957.48,1786.61 C1.2 1075.2,1650 1093.7,1668.5 D2.1 1207.87,1668.5 1224.41,1685.04 C2.2
NetC7_2: C7.2 D4.1 P6.2 Q6.2 | length 832.4
  Top Layer w50: P6.2 288.98,2301.57 309.06,2281.5 D4.1 ; v5(460.63,2157.48) 450,2168.11 D4.1 ; Q6.2 681.1,2281.5 D4.1
  Bottom Layer w50: v5(460.63,2157.48) 500,2118.11 C7.2
NetC10_2: C10.2 U5.2 | length 241.9
  Top Layer w10: U5.2 2710.63,2206.63 v1(2720,2216) ; v1(2800,2216) 2807.62,2216 C10.2
  Bottom Layer w10: v1(2720,2216) v1(2800,2216)
NetC11_2: C11.2 D5.1 P8.2 Q8.2 | length 1518.8
  Top Layer w50: P8.2 366.54,1605.91 699.61,1272.83 Q8.2 780,1250 939.45,1090.55 1251.97,1090.55 1300,1138.58 D5.1
  Bottom Layer w50: P8.2 358.66,1605.91 429.13,1535.43 C11.2
NetC14_1: C14.1 U6.5 Y1.2 | length 493.3
  Top Layer w10: U6.5 2537.29,1365.27 Y1.2 2536,1304 C14.1
NetC15_1: C15.1 U6.6 Y1.1 | length 693.1
  Top Layer w10: U6.6 2483.69,1446.71 Y1.1 2678.71,1106.14 C15.1
NetC18_2: C18.2 U9.1 | length 197
  Top Layer w15: C18.2 1950,530 1980,500 U9.1
NetC21_2: C21.2 R33.2 S2.2 U6.7 | length 2139.5
  Top Layer w10: U6.7 2462.24,1496 2528,1496 2552,1520 2784,1520 2800,1504 v1(2872,1504) ; v1(2928,1504) v1(2928,1624) ; v1(2952,2312) 2975.43,2335.43 3400,2335.43 C21.2 3500,2404 3551.91,2455.91 S2.2
  Bottom Layer w10: v1(2872,1504) v1(2928,1504) ; v1(2928,1624) 2928,2288 v1(2952,2312)
NetCB1_1: CB1.1 P2.1 | length 270.7
  Top Layer w100: P2.1 611.02,2800 661.02,2850 CB1.1
NetD1_1: D1.1 R2.1 | length 129.1
  Top Layer w20: R2.1 D1.1
NetD3_2: D3.2 L1.1 U2.2 | length 1223.9
  Top Layer w20: U2.2 1116.93,2993.31 1141.73,2968.5 1346.46,2968.5 ; D3.2 1431.5,3053.54 1346.46,2968.5 ; L1.1 1898.03,2748.03 1429.13,2748.03 1346.46,2830.71 1346.46,2968.5
NetLS1_2: LS1.2 Q5.3 | length 493.6
  Top Layer w15: LS1.2 2550.39,3101.57 2622.05,3173.23 2622.05,3216.34 Q5.3
NetP5_2: P5.2 Q3.2 | length 388.6
  Top Layer w100: P5.2 445.91,1044.09 540,950 Q3.2
NetP7_4: P7.4 R41.1 | length 172.2
  Top Layer w10: R41.1 3546,1304 P7.4
NetP7_6: P7.6 R18.1 | length 164.6
  Top Layer w10: R18.1 P7.6
NetP7_7: P7.7 R20.1 | length 164.6
  Top Layer w10: R20.1 P7.7
NetP7_8: P7.8 R21.1 | length 164.6
  Top Layer w10: R21.1 P7.8
NetP13_1: P13.1 R34.1 | length 1056
  Top Layer w10: P13.1 1314.57,750 R34.1
NetP14_1: P14.1 U9.2 | length 1161.6
  Top Layer w20: P14.1 1282.28,232.28 1996.06,232.28 2150,386.22 U9.2
NetP14_2: P14.2 U9.3 | length 1139.2
  Top Layer w20: P14.2 1374.41,150 1425.2,200.79 2023.62,200.79 2250,427.17 U9.3
NetQ1_1: Q1.1 Q2.3 R3.2 | length 258.7
  Top Layer w10: Q1.1 979.13,1947.72 v1(1075.71,2044.29) Q2.3
  Bottom Layer w10: R3.2 1064.57,2055.43 v1(1075.71,2044.29)
NetQ2_1: Q2.1 R6.2 | length 104.4
  Top Layer w15: Q2.1 1068.31,1950 v1(1100,1950)
  Bottom Layer w15: R6.2 1100,1935.43 v1(1100,1950)
NetQ3_1: Q3.1 Q4.3 R7.2 | length 283.4
  Top Layer w10: Q3.1 983.65,860.24 v1(1117.71,994.29) Q4.3
  Bottom Layer w10: R7.2 1114.57,997.43 v1(1117.71,994.29)
NetQ4_1: Q4.1 R10.2 | length 94.8
  Top Layer w10: Q4.1 1134.29,905.71 v1(1144,896)
  Bottom Layer w10: R10.2 1144,875.43 v1(1144,896)
NetQ5_1: Q5.1 R12.1 | length 185.9
  Top Layer w10: Q5.1 2767.72,3212.6 2840.55,3285.43 R12.1
NetQ6_1: Q6.1 Q7.3 R13.2 | length 273.3
  Top Layer w10: Q6.1 979.13,2275.13 1048.29,2344.29 v1(1072.29,2344.29) Q7.3
  Bottom Layer w10: R13.2 1064.57,2352.02 v1(1072.29,2344.29)
NetQ7_1: Q7.1 R17.2 | length 91.2
  Top Layer w10: Q7.1 v1(1088.29,2255.71)
  Bottom Layer w10: R17.2 1088.29,2223.72 v1(1088.29,2255.71)
NetQ8_1: Q8.1 Q9.3 R19.2 | length 340.4
  Top Layer w10: Q8.1 979.13,1259.13 1014.29,1294.29 v1(1113.71,1294.29) Q9.3
  Bottom Layer w10: v1(1113.71,1294.29) 1113.71,1349.14 R19.2
NetQ9_1: Q9.1 R23.2 | length 100.9
  Top Layer w10: Q9.1 1125.38,1205.71 1144.57,1186.52 v1(1157.48,1186.52)
  Bottom Layer w10: v1(1157.48,1186.52) 1185.43,1158.57 R23.2
NetR9_1: R9.1 U3.3 | length 117.7
  Top Layer w15: U3.3 v1(3111.02,3042.52)
  Bottom Layer w15: v1(3111.02,3042.52) 3157.09,3042.52 R9.1
NetR11_1: R11.1 U3.10 | length 221.9
  Top Layer w10: v1(3624,2724.41) 3676.77,2724.41 U3.10
  Bottom Layer w10: R11.1 3514.57,2691.73 3547.24,2724.41 v1(3624,2724.41)
NetR24_2: R24.2 U6.28 | length 323.4
  Top Layer w10: U6.28 2425.19,1922.62 v1(2425.19,2126.81)
  Bottom Layer w10: R24.2 2387.43,2164.57 v1(2425.19,2126.81)
NetR31_2: R31.2 U6.60 | length 314.8
  Top Layer w10: v1(2120,1416) 2120,1422.56 U6.60
  Bottom Layer w10: v1(2120,1416) 2120,1360 2152,1328 2242.57,1328 R31.2
NetR32_1: R32.1 R34.2 U8.2 | length 1035.9
  Top Layer w10: R34.2 1746,850 1816,920 1816,1056 1792,1080 1816,1104 1816,1208 1774,1250 R32.1 ; U8.2 U8.2@1774.02,1075
NetR32_2: R32.2 R39.2 U8.1 | length 407.8
  Top Layer w10: R32.2 1414.57,1220.87 R39.2 1594,1150 1619,1125 U8.1
NetR35_1: R35.1 U9.8 | length 114.6
  Bottom Layer w10: R35.1 U9.8
NetR36_2: R36.2 U8.3 | length 393.8
  Top Layer w10: R36.2 1414.57,990.57 1424,1000 1640,1000 1665,1025 U8.3
NetR37_2: R37.2 U5.7 | length 94.8
  Top Layer w10: v1(2576,2088) 2578.94,2090.94 U5.7
  Bottom Layer w10: R37.2 2537.98,2088 v1(2576,2088)
PGND: C3.2 C6.2 C18.1 D1.2 D3.1 P1.3 P2.2 P4.7 P11.3 P12.3 P13.2 Q1.3 Q3.3 Q5.2 Q6.3 Q8.3 R1.1 R4.2 R36.1 R40.1 U1.5 U2.3 U2.5 U8.4 U9.5 | length 5033.9
  Top Layer w20: R36.1 1540,950 v2(1550,960) 1670,960 1685,975 U8.4 ; R40.1 1495.43,1040 v2(1530,1040) ; U9.5 2450,700 v2(2450,620)
  Top Layer w50: D1.2 854.72,3385.43 C3.2 1000.79,3299.21 v5(1040,3260) ; v5(854.25,3084.25) U2.5 ; v5(960,1410) 979.13,1390.87 Q8.3 ; v5(960,2020) 979.13,2039.13 Q1.3 ; Q6.3 v5(979.13,2460.87)
  Top Layer w100: v8(980,960) v8@980,1008.69
  Bottom Layer w20: v2(1530,1040) 1550,1020 v2(1550,960) ; P12.3 1856.85,90 2210,90 2246.85,126.85 P1.3 2320,150 v2(2430,260)
  Bottom Layer w50: 790,3020 v5(854.25,3084.25) v5@854.25,3074.25 ; 860,1420 950,1420 v5(960,1410) ; 860,2020 v5(960,2020) ; 860,2490 950,2490 v5(979.13,2460.87)
  Bottom Layer w100: P2.2 635.98,3174.02 790,3020 860,2950 860,2490 860,2020 860,1420 860,1000 900,960 v8(980,960)
  other v1: 1450,1100
PUMP1: R22.1 R23.1 U6.36 | length 1885.9
  Top Layer w10: v1(1074.8,1145.67) 1062.99,1157.48 1062.99,1236.22 v1(1076.77,1250) ; v1(1208.94,1296) 1240.16,1327.21 v1(1240.16,1381.89) ; v1@1236.22,1532 1916,1532 v1(1968,1584) ; U6.36 2228.92,1896.35 v1(2228.92,1844.92)
  Bottom Layer w10: v1(1074.8,1145.67) 1110.24,1145.67 R23.1 ; v1(1076.77,1250) R22.1 1114.57,1266.57 1144,1296 v1(1208.94,1296) ; v1(1240.16,1381.89) v1(1240.16,1527.56) ; v1(1968,1584) 2176,1584 2228.92,1636.92 v1(2228.92,1844.92)
PUMP2: R5.1 R6.1 U6.37 | length 1259.5
  Top Layer w10: v1(1175.87,2007.87) 1240,2072 2025.44,2072 U6.37
  Bottom Layer w10: R6.1 R5.1 1168,2000 v1(1175.87,2007.87)
SGND: C4.2 C5.2 C8.2 C9.2 C10.1 C14.2 C15.2 C19.2 C20.2 C21.1 C22.2 C23.2 P7.2 P7.11 P9.4 P10.4 Q2.2 Q4.2 Q7.2 Q9.2 R1.2 R11.2 R24.1 R28.1 R28.2 R28.3 R28.4 R28.7 R31.1 R37.1 S1.1 S1.2 S2.1 U3.9 U4.1 U5.5 U5.10 U5.12 U6.12 U6.18 U6.31 U6.47 U6.63 U7.1 | length 5587.3
  Top Layer w10: Q2.2 1436.29,1955.71 1492,1900 U7.1 ; Q7.2 1632.29,2255.71 v1(1632,2256) ; v1(1187.4,780.6) Q4.2 ; Q9.2 1229.69,1248 1320,1248 1392,1320 v1(1632,1320) ; v1(1192,728) 1200,720 1307.19,720 1331.19,744 1560,744 v1(1640,824) ; U6.31 2392,1972.95 2392,2008 v3(2384,2016) ; v1(2488,1736) 2516,1736 2543.33,1763.33 U6.18 ; U6.12 2527.44,1570 2541.98,1570 v1(2543.98,1572) ; v1(2560,2184) 2640,2184 2651.57,2172.43 U5.5 ; C21.1 3585.43,2264.57 S2.1
  Top Layer w20: U4.1 1662.55,3209.45 1686.57,3185.43 R1.2 1766.57,3185.43 1837.43,3114.57 C8.2 1997.24,3114.57 C9.2 ; v2(2056,2680) 2056,2952 2000,3008 C9.2 ; S1.1 S1.2 2167.32,3117.32 C9.2 ; v2(2864,2328) 2936,2400 C5.2 3067.32,2491.32 v2(3096,2520) ; v2(3232,2728) 3576,2728 3622,2682 v2(3622,2650) 3623.18,2648.82 U3.9
  Bottom Layer w10: v1(1187.4,780.6) 1187.4,732.6 v1(1192,728)
  Bottom Layer w20: v3(1960,2250) 1960,2336 2056,2432 v2(2056,2680) ; v2(3096,2520) 3096,2592 3154,2650 C4.2 3214.57,2710.57 v2(3232,2728) ; R11.2 v2(3622,2650)
  other v3: 3350,1090 2190,1200 2190,1380 1850,1610 2536,1912 2768,1928 2264,2104
SR_D0: R18.2 U6.11 | length 859.5
  Top Layer w10: U6.11 2517.6,1552 v1(2840,1552) ; v1(2984,1536) 3048,1536 3084,1500 R18.2
  Bottom Layer w10: v1(2840,1552) 2952,1552 2968,1536 v1(2984,1536)
SR_D1: R20.2 U6.14 | length 820.1
  Top Layer w10: U6.14 2577.11,1576 v1(2816,1576) ; v1(2984,1568) 3248,1568 3280,1600 R20.2
  Bottom Layer w10: v1(2816,1576) 2976,1576 v1(2984,1568)
SR_D2: R21.2 U6.15 | length 830.2
  Top Layer w10: U6.15 2584.95,1596 v1(2836,1596) ; v1(2980,1596) 3048,1664 3232,1664 3268,1700 R21.2
  Bottom Layer w10: v1(2836,1596) v1(2980,1596)
SR_LED: P7.3
SR_SW: R41.2 U6.20 | length 1312.1
  Top Layer w10: U6.20 2563.86,1838.58 3141.53,1838.58 3176,1804.11 v1(3176,1800) ; v1(3200,1304) R41.2
  Bottom Layer w10: v1(3176,1800) 3176,1328 v1(3200,1304)
SR_VT: P7.5
SW1: S1.4 U6.42 | length 1911.3
  Top Layer w10: v1(2080,1896) 2080,1878.24 U6.42 ; v1(2128,2392) v1(2384,2392)
  Bottom Layer w10: v1(2080,1896) 2080,2368 2104,2392 v1(2128,2392) ; v1(2384,2392) 2388,2396 2388,3252 2436,3300 S1.4
SW2: S1.3 U6.43 | length 1849.1
  Top Layer w10: v1(2058.4,1872) U6.43 ; v1(2104,2416) 2384,2416 v1(2408,2440)
  Bottom Layer w10: v1(2058.4,1872) 2058.4,2386.4 2088,2416 v1(2104,2416) ; v1(2408,2440) 2408,3176 2432,3200 S1.3
SWCLK: P9.3 U6.49 | length 1396.7
  Top Layer w10: U6.49 2079.21,1688 2312,1688 v1(2320,1680) ; v1(2376,1176) 2408,1144 v1(2488,1144) ; v1(2736,1144) 2856,1144 P9.3
  Bottom Layer w10: v1(2320,1680) 2388.56,1611.44 2388.56,1236.39 2368,1215.83 2368,1184 v1(2376,1176) ; v1(2488,1144) v1(2736,1144)
SWDIO: P9.2 U6.46 | length 1611.5
  Top Layer w10: U6.46 2134.89,1712 2976,1712 v1(3008,1680)
  Bottom Layer w10: P9.2 3028,1100 3048,1120 3048,1288 3008,1328 v1(3008,1680)
TEM: R25.1 U6.39 U7.2 | length 599.5
  Top Layer w10: U7.2 1682,1950 1717.43,1914.57 R25.1 1751.43,1916 2125.76,1916 U6.39
TTIM_IO: U6.22
TTIM_RSI: U6.23
TTIM_SCLK: U6.21
WIFI_RX: U3.15 U6.16 | length 2518.2
  Top Layer w10: U6.16 2579.62,1672 v1(2576,1672) ; v1(2648,3072) 2666.57,3090.57 3562.57,3090.57 3593.26,3121.26 U3.15
  Bottom Layer w10: v1(2576,1672) 2579.62,1672 2648,1740.38 2648,2318.63 2647.95,2318.67 v1(2648,3072) v1(2648,3072)
WIFI_TX: U3.16 U6.17 | length 2473.5
  Top Layer w10: U6.17 2600,1791.21 v1(2600,1800) ; v1(2600,3072) 2688,3160 3560,3160 3600,3200 U3.16
  Bottom Layer w10: v1(2600,1800) 2600.76,1800.76 2600.76,3071.24 v1(2600,3072)
YF_BUSY: R35.2 U6.2 | length 1172.7
  Top Layer w10: v1(2096,624) 2096,912 2120,936 v1(2368,936) ; U6.2 2400,1419.05 v1(2400,1216)
  Bottom Layer w10: R35.2 2086.57,614.57 v1(2096,624) ; v1(2368,936) 2376,936 2400,960 v1(2400,1216)
YF_DATA: U6.3 U9.7 | length 947.8
  Top Layer w10: v1(2168,968) 2176,976 v1(2424,976) ; U6.3 2424,1422.89 v1(2424,1192)
  Bottom Layer w10: U9.7 2150,950 v1(2168,968) ; v1(2424,976) v1(2424,1192)
YF_RESET: U6.4 U9.6 | length 896.9
  Top Layer w10: v1(2256,1008) 2440,1008 v1(2448,1016) ; U6.4 2448,1426.73 v1(2448,1168)
  Bottom Layer w10: U9.6 2250,1002 v1(2256,1008) ; v1(2448,1016) v1(2448,1168)
pads on no net: D6.1 D6.2 D7.1 D7.2 D8.1 D8.2 P7.1 P7.9 P15.1 P15.2 P15.3 P15.4 P15.5 P15.6 P15.7 S3.1 S3.2 S3.3 S3.4 S4.1 S4.2 S4.3 S4.4 U1.3 U1.4 U2.6 U3.2 U3.4 U3.5 U3.6 U3.7 U3.11 U3.12 U3.13 U3.14 U4.4 U5.3 U5.8 U5.9 U5.11 U5.13 U5.15 U5.16 U6.1 U6.9 U6.24 U6.25 U6.38 U6.40 U6.61 U6.62 U8.5 U8.6 U8.7
copper on no net: | length 7908.8
  Top Layer w20: 3936.38,1476.38 4211.97,1200.79 4211.97,787.4 4555.67,443.7 4605.67,443.7 ; 3936.38,1574.8 4290.71,1220.47 4290.71,1152.36 4605.67,837.4 ; 3936.38,1673.23 4378.5,1231.1 4605.67,1231.1 ; 3936.38,1771.65 4008.82,1771.65 4223.78,1986.61 ; 3936.38,1870.08 4034.8,1870.08 4133.23,1968.5 4133.23,2637.8 4251.34,2755.91
  Bottom Layer w20: 3936.38,1377.95 4183.23,1131.1 4605.67,1131.1 4616.3,1131.1 4684.41,1062.99 4684.41,816.14 4605.67,737.4 4684.41,658.66 4684.41,422.44 4605.67,343.7 ; 3936.38,1968.5 4015.12,1889.76 4605.67,1889.76 ; 4723.78,1786.61 4620.63,1889.76 4605.67,1889.76 ; 4723.78,2534.65 4605.67,2416.54 4605.67,1889.76

## Polygon pours and split planes (outlines as drawn)
SGND on Top Layer "TSGND" (solid, remove dead copper, pour order 2): 1574.8,2362.2 1574.8,787.4 3543.31,787.4 3543.31,2362.2
PGND on Top Layer "TPGND" (solid, remove dead copper, pour order 12): 3300,200 3300,700 1500,700 1500,2500 2900,2500 2900,3300 700,3300 700,200
SGND on Bottom Layer "BSGND" (solid, remove dead copper, pour order 4): 1574.8,2362.2 1574.8,787.4 3543.31,787.4 3543.31,2362.2
PGND on Bottom Layer "BPGND" (solid, remove dead copper, pour order 10): 2900,2500 1500,2500 1500,1400 1500,700 3300,700 3300,200 400,200 400,800 900,800 900,3300 2900,3300

## Silkscreen, mask and mechanical layers (free items; w line width, h text height)
Top Overlay:
  text "VCUT" at 4040,3290 h300
  text "+" at 80,2380 h100 r90
  text "-" at 70,2240 h100 r90
  text "G" at 2830,1330 h100 r90
  text "TX" at 2930,1320 h100 r90
  text "RX" at 3030,1320 h100 r90
  text "5V" at 3130,1320 h100 r90
  text "+" at 200,1170 h100 r90
  text "-" at 190,1020 h100 r90
  text "CLK" at 2930,860 h100 r90
  text "DIO" at 3030,860 h100 r90
  text "3.3V" at 3150,860 h100 r90
  text "GND" at 2830,850 h100 r90
Bottom Overlay:
  text "GND" at 410,3110 h200
  text "+12V" at 410,2740 h200
  text "MOTOR1" at 110,2160 h100 r90
  text "-" at 200,2000 h200
  text "+" at 220,1840 h200
  text "MOTOR2" at 100,1710 h100 r90
  text "-" at 170,1550 h200
  text "+" at 200,1390 h200
  text "Tem_Fire" at 210,780 h100 r90
  text "-" at 280,440 h100 r270
  text "Fire_Detect" at 560,160 h100 r180
  text "-" at 1880,130 h100
  text "-" at 2330,130 h100
  text "Speaker" at 1080,90 h100 r180
  text "Leakage" at 1530,90 h100 r180
  text "Store_V" at 2000,90 h100 r180
Mechanical 1:
  lines w10: 3778.9,0 3778.9,3149.61 4960,3149.61 4960,0 3778.9,0
Mechanical 13:
  lines w10: 0,0 3779.53,0 ; 0,0 0,0 ; 0,0 0,3503.94 3779.45,3503.94 3779.53,3504.02 3779.53,0 ; 3779.53,0 3779.53,0

## Text inside footprints (layer, text, board x,y; h text height)
P7: Top Overlay "ANT" at 3490,530 h196.85 r270